# Altium PCB PA_Channel_SUP_CTRL.PcbDoc
Units mm, origin at the board's own origin, x right, y up, seen from the top; angles counter-clockwise.
Board outline 189.5 x 29.5 mm, 2 copper layers (Top Layer, Bottom Layer), stack 1.571 mm thick; 29 components, 33 nets, 129 pads, 0 vias.
Unrouted connection lines stored in the file: 72.
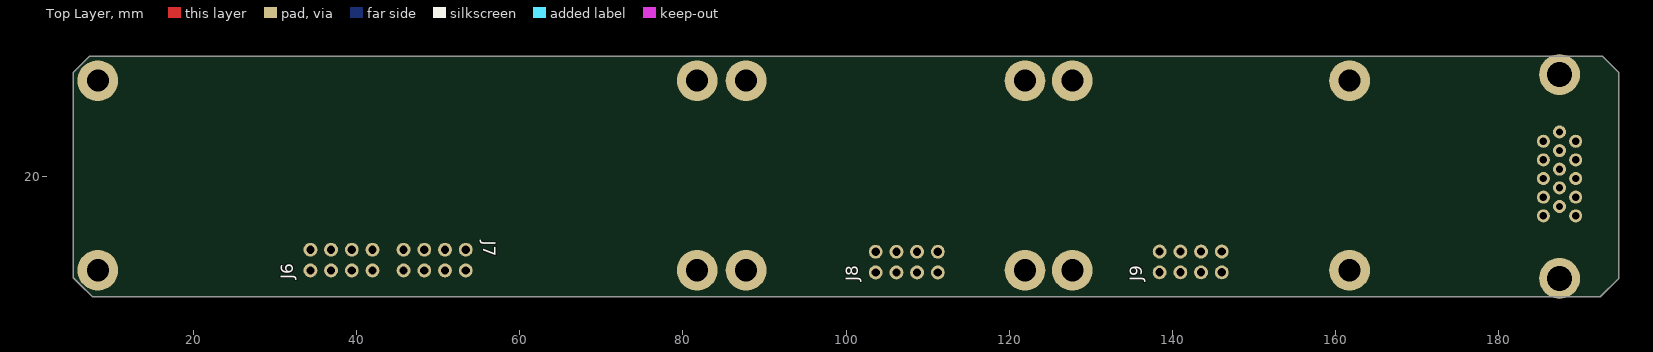
[diagram p0: Top Layer view]
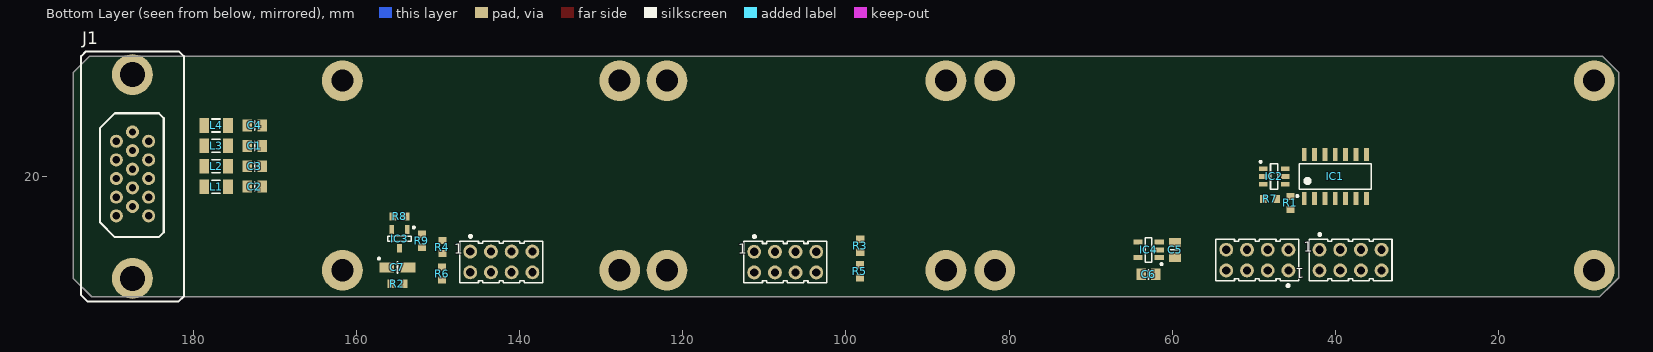
[diagram p1: Bottom Layer view, seen from below]

## Layer stack, top to bottom
Top Solder: solder mask 0.0102, Solder Resist, Dk 3.5
Top Layer: signal copper 0.0356
Dielectric 1: dielectric 1.5, FR-4, Dk 4.8
Bottom Layer: signal copper 0.0356
Bottom Solder: solder mask 0.0102, Solder Resist, Dk 3.5

## Board outline
5.989,6.851 5.25,7.59 5.25,32.75 7.25,34.75 192.75,34.75 194.75,32.75 194.75,7.5 192.5,5.25 7.59,5.25

## Design rules (kind name [scope] priority, off if disabled: settings)
Clearance [All] p1: gap=0.254
PolygonConnect [All] p1: connectstyle=Relief reliefconductorwidth=0.254 reliefentries=4 polygonreliefangle="90 Angle" airgapwidth=0.254
RoomDefinition PA_Channel_SUP_CTRL [InComponentClass('PA_Channel_SUP_CTRL')] p1: confinementstyle=ConfineIn formatcopy=TRUE lockcomponents=FALSE outline 196,4.5 172,4.5 172,36.25 196,36.25
RoutingVias [All] p1: holewidth=0.711 width=1.27 viastyle="Through Hole" minholewidth=0.711 minwidth=1.27 maxholewidth=0.711 maxwidth=1.27
SolderMaskExpansion [All] p1: expansion=0.102
Width [All] p1: maxlimit=0.254 minlimit=0.254 preferedwidth=0.254
30 further rules are at their usual default settings.

## Components (designator, comment, footprint, x,y, rotation, side; value= is the part's Value field where it differs from the comment)
C1 "1uF" CAPC2012X110N 172.5,23.75 r0 bottom
C2 "1uF" CAPC2012X110N 172.5,18.75 r0 bottom
C3 "1uF" CAPC2012X110N 172.5,21.25 r0 bottom
C4 "1uF" CAPC2012X110N 172.5,26.25 r0 bottom
C5 "1uF" CAPC2012X140N 59.65,11 r90 bottom
C6 "1uF" CAPC2012X140N 62.9,8 r0 bottom
C7 "10uF" CAPMP3216X180N 155,8.85 r180 bottom
IC1 "SN74LVC32AD" SOIC127P600X175-14N 40,20 r90 bottom
IC2 "SN74LVC2G04DBVR" SOT95P280X145-6N 47.5,20 r180 bottom
IC3 "TS3431ILT" SOT95P237X112-3N 154.75,12.35 r270 bottom
IC4 "NCP703SN33T1G" SOT95P275X110-5N 62.9,11 r0 bottom
J1 "HD-Sub" TYCO_5750489-1 187.5,20 r270 bottom
J6 "Header 8" ZL2019-8_MIRR 38.13,9.75 r180 top
J7 "Header 8" ZL2019-8_MIRR 49.56,9.75 r0 top
J8 "Header 8" ZL2019-8_MIRR 107.45,9.5 r180 top
J9 "Header 8" ZL2019-8_MIRR 142.27,9.516 r180 top
L1 "600R@100MHz" INDC3216X130N 177.25,18.75 r0 bottom
L2 "600R@100MHz" INDC3216X130N 177.25,21.25 r180 bottom
L3 "600R@100MHz" INDC3216X130N 177.25,23.75 r0 bottom
L4 "600R@100MHz" INDC3216X130N 177.25,26.25 r180 bottom
R1 "0" RESC1608X55N 45.5,16.75 r90 bottom
R2 "1k" RESC1608X55N 155,6.85 r0 bottom
R3 "0" RESC1608X55N 98.25,11.5 r90 bottom
R4 "0" RESC1608X55N 149.5,11.35 r90 bottom
R5 "Undefined" RESC1608X55N 98.287,8.392 r90 bottom
R6 "Undefined" RESC1608X55N 149.537,8.1 r90 bottom
R7 "0" RESC1608X55N 48,17.25 r0 bottom
R8 "0" RESC1608X55N 154.75,15.1 r0 bottom
R9 "Undefined" RESC1608X55N 152,12.1 r90 bottom

## Footprints (in the part's own frame and the unit in brackets; to place one, negate y for a bottom-side part, rotate by r counter-clockwise, add the part's x,y. Pads: shape width x height; smd on the part's side, far side on the other; paste and mask are expansions set on the pad)
CAPC2012X110N [mm] "Chip Capacitor, Body 2.0x1.25mm, IPC Medium Density"
  rect 1.15x1.45 smd: 1(-0.9,0) 2(0.9,0)
  silkscreen extent 0,-0.58 0,0.58, body extent -1.05,-0.67 1.05,0.68, height 1.1
CAPC2012X140N [mm] "Chip Capacitor, Body 2.0x1.25mm, IPC Medium Density"
  rect 1.15x1.45 smd: 1(-0.9,0) 2(0.9,0)
  silkscreen extent 0,-0.58 0,0.58, body extent -1.05,-0.67 1.05,0.68, height 1.3
CAPMP3216X180N [mm] "Capacitor, Polarized, Molded  Body 3.2x1.6mm, IPC Medium Density"
  rect 1.8x1.25 smd: 1(-1.3,0) 2(1.3,0)
  silkscreen extent -2.4,-0.7 0,1.2, body extent -1.7,-0.9 1.7,0.9, height 1.6
INDC3216X130N [mm] "Chip Inductor, EIA 1206, Metric 3216, 3.20mm L X 1.60mm W, IPC Medium Density"
  rect 1.2x1.8 smd: 1(-1.45,0) 2(1.45,0)
  silkscreen extent -0.5,-0.8 0.5,0.8, body extent -1.7,-0.9 1.7,0.9, height 1.3
RESC1608X55N [mm] "Chip Resistor, EIA 0603, Metric 1608, Body 1.6x0.8mm, IPC Medium Density"
  rect 0.9x1 smd: 1(-0.8,0) 2(0.8,0)
  body extent -0.87,-0.47 0.88,0.48, height 0.55
SOIC127P600X175-14N [mm] "SOIC 14, Pitch 1.27mm - Body 4x8.75mm, IPC Medium Density"
  rect 1.55x0.6 smd: 1(-2.7,3.81) 2(-2.7,2.54) 3(-2.7,1.27) 4(-2.7,0) 5(-2.7,-1.27) 6(-2.7,-2.54) 7(-2.7,-3.81) 8(2.7,-3.81) 9(2.7,-2.54) 10(2.7,-1.27) 11(2.7,0) 12(2.7,1.27) 13(2.7,2.54) 14(2.7,3.81)
  silkscreen extent -2.52,-4.4 1.55,4.79, body extent -3.1,-4.37 3.1,4.38, height 1.75
SOT95P237X112-3N [mm] "SOT, 0.95mm, pitch; 3 pin,1.30mm W X 2.92mm L X 1.12mm H body, IPC Medium Density"
  rect 1.05x0.6 smd: 1(-1.15,0.95) 2(-1.15,-0.95) 3(1.15,0)
  silkscreen extent -1.52,-1.45 0.3,1.87, body extent -1.25,-1.5 1.25,1.5, height 1.1
SOT95P275X110-5N [mm] "SOT, 0.95mm Pitch; 5 Pin, 1.50mm W X 3.00mm L X 1.10mm H Body, IPC Medium Density"
  rect 1.15x0.6 smd: 1(-1.3,0.95) 2(-1.3,0) 3(-1.3,-0.95) 4(1.3,-0.95) 5(1.3,0.95)
  silkscreen extent -1.72,-1.5 0.4,1.87, body extent -1.37,-1.5 1.37,1.5, height 1.1
SOT95P280X145-6N [mm] "SOT23, 6-Leads, Body 1.6x3.0mm, Pitch 0.95mm, IPC Medium Density"
  rect 1.05x0.6 smd: 1(-1.35,0.95) 2(-1.35,0) 3(-1.35,-0.95) 4(1.35,-0.95) 5(1.35,0) 6(1.35,0.95)
  silkscreen extent -1.78,-1.55 0.45,1.92, body extent -1.4,-1.5 1.4,1.5, height 1.45
TYCO_5750489-1 [mm]
  round 5 hole 3.07: 0(-12.497,0) 0(12.497,0)
  round 1.6 hole 0.9: 1(-4.318,1.98) 2(-2.032,1.98) 3(0.254,1.98) 4(2.54,1.98) 5(4.826,1.98) 6(-5.461,0) 7(-3.175,0) 8(-0.889,0) 9(1.397,0) 10(3.683,0) 11(-4.318,-1.98) 12(-2.032,-1.98) 13(0.254,-1.98) 14(2.54,-1.98) 15(4.826,-1.98)
  silkscreen extent -15.35,-6.3 15.35,6.34, body extent -15.4,-6.25 15.4,6.25, height 12.11
ZL2019-8_MIRR [mm]
  round 1.7 hole 1: 1(-3.81,-1.27) 2(-3.81,1.27) 3(-1.27,-1.27) 4(-1.27,1.27) 5(1.27,-1.27) 6(1.27,1.27) 7(3.81,-1.27) 8(3.81,1.27)
  body extent -5.08,-2.5 5.08,2.54, height 16.4

## Part data
C1 C2 C3 C4: library part CC0805_1UF_50V_10%_X7R, "Non-polarised capacitor"
C5 C6: library part CC0805_1UF_35V_20%_X7R, "Non-polarised capacitor"
C7: library part CTE3216-18_10UF_16V_20%_AVX_TCJ, "Polarised capacitor"
IC1: "Quad 2-Input OR Gate"
IC2: "Dual Inverter Buffer"
IC3: "Precision Reference 1=Adj 2=Cathode 3=Anode"
IC4: "3.3V 300mA, Ultra-Low Quiescent Current, IQ 12uA, Ultra-Low Noise, LDO Voltage Regulator"
J1: "Connector High Density D-sub 15 Male"
J6 J7 J8 J9: "Connector 8 Male"
L1 L2 L3 L4: library part IND1206_WURTH_74279218, "Inductor"
R1 R3 R4 R7 R8: library part R0603_0R_JUMPER, "Resistor"
R2: library part R0603_1K_1%_0.1W_100PPM, "Resistor - 1%"
R5 R6 R9: library part R0603_NO-VALUE, "Resistor"

## Free pads (board coordinates)
  round 5 hole 2.7 unplated: 0(127.75,8.5) 4(121.95,8.5) 5(127.75,31.75) 6(87.75,8.5) 7(161.75,8.5) 8(81.75,8.5) 9(87.75,31.75) 10(161.75,31.75) 11(121.95,31.75) 12(8.25,8.5) 14(8.25,31.75) 15(81.75,31.75)

## Nets (pads, with @x,y where several pads share a name; then routed paths per layer and width w, separated by ;. In a path a pad name is that pad's centre, name@x,y a point inside that pad or via, vN(x,y) a via of type N, cw(c..) or ccw(c..) an arc to the next point about the centre after c; other vN are vias at no path point)
ADL_Q: IC1.9 IC1.10 IC2.4 J6.5 R1.2
ALERT: J8.6
FR_PWR: J1.5 J9.6
FR_Q: IC1.13 J9.5
FR_RST: J6.2 J9.3 R1.1
FR_VREF: J9.2 R4.1 R6.2
GND: C1.1 C2.1 C3.1 C4.1 C5.1 C6.1 C7.2 IC1.1 IC1.2 IC1.4 IC1.5 IC1.7 IC2.2 IC3.3 IC4.2 J1.6 J1.11 J6.8 J7.8 J8.8 J9.8 R5.1 R6.1 R9.1
IN_PWR: J6.6
IN_VREF: J6.4 R3.1 R5.2
INPUT_OVERDRIVE: J1.3
IUSR_IO: J1.1
N8V0_CH: C1.2 J8.7 L3.1
NetC7_1: C7.1 IC3.2 R2.2 R3.2 R4.2 R8.2
NetIC1_8: IC1.8 IC1.12
NetIC3_1: IC3.1 R8.1 R9.2
NetJ1_2: J1.2 J1.8 L2.1
NetJ1_7: J1.7 L4.1
NetJ1_12: J1.12 L3.2
NetJ1_13: J1.13 L1.2
ON_OFF: IC2.3 J1.14
P3V3: C6.2 IC4.5 J8.5 R7.2
P3V3A: J9.7
P5V0MP: C2.2 C5.2 IC4.1 IC4.3 L1.1 R2.1
P6V0_CH: C4.2 J7.7 L4.2
P29V0_CH: C3.2 J8.1 J8.3 L2.2
RFA: IC1.11 IC2.1 J7.1
RFB: IC2.6 J7.2
RFL_PWR: J1.10 J9.1
SCK: J8.4
SCL: J1.9
SDA: J1.4 J8.2
SIGNAL_GND: J1.15 J9.4
VCC: IC1.14 IC2.5 R7.1
pads on no net: IC1.3 IC1.6 IC4.4 J1.0 J6.1 J6.3 J6.7 J7.3 J7.4 J7.5 J7.6

## Silkscreen, mask and mechanical layers (free items; w line width, h text height)
Mechanical 1:
  lines w0.1: 194.75,31.75 ccw(c191.75,31.75) 191.75,34.75 8.25,34.75 ccw(c8.25,31.75) 5.25,31.75 5.25,8.5 ccw(c8.25,8.5) 8.25,5.5 161.75,5.5 191.75,5.5 ccw(c191.75,8.5) 194.75,8.5 194.75,11.25 194.75,28.25 195,28.5 195,29 194.75,29.25 194.75,32
Mechanical 3:
  drawing of 471 lines, arcs and shapes, not listed

## Text inside footprints (layer, text, board x,y; h text height)
J6: Bottom Overlay "1" at 43.896,10.766 h1.2
J7: Bottom Overlay "1" at 43.794,8.734 h1.2 r180
J8: Bottom Overlay "1" at 113.216,10.516 h1.2
J9: Bottom Overlay "1" at 148.036,10.532 h1.2